# Altium PCB SUBBOARD-boost_filter_3p_LCL.PcbDoc
Units mm, origin at the board's own origin, x right, y up, seen from the top; angles counter-clockwise.
Board outline 144.4 x 140.72 mm, 2 copper layers (Top Layer, Bottom Layer), stack 1.569 mm thick; 76 components, 46 nets, 247 pads, 12 vias.
Unrouted connection lines stored in the file: 2.
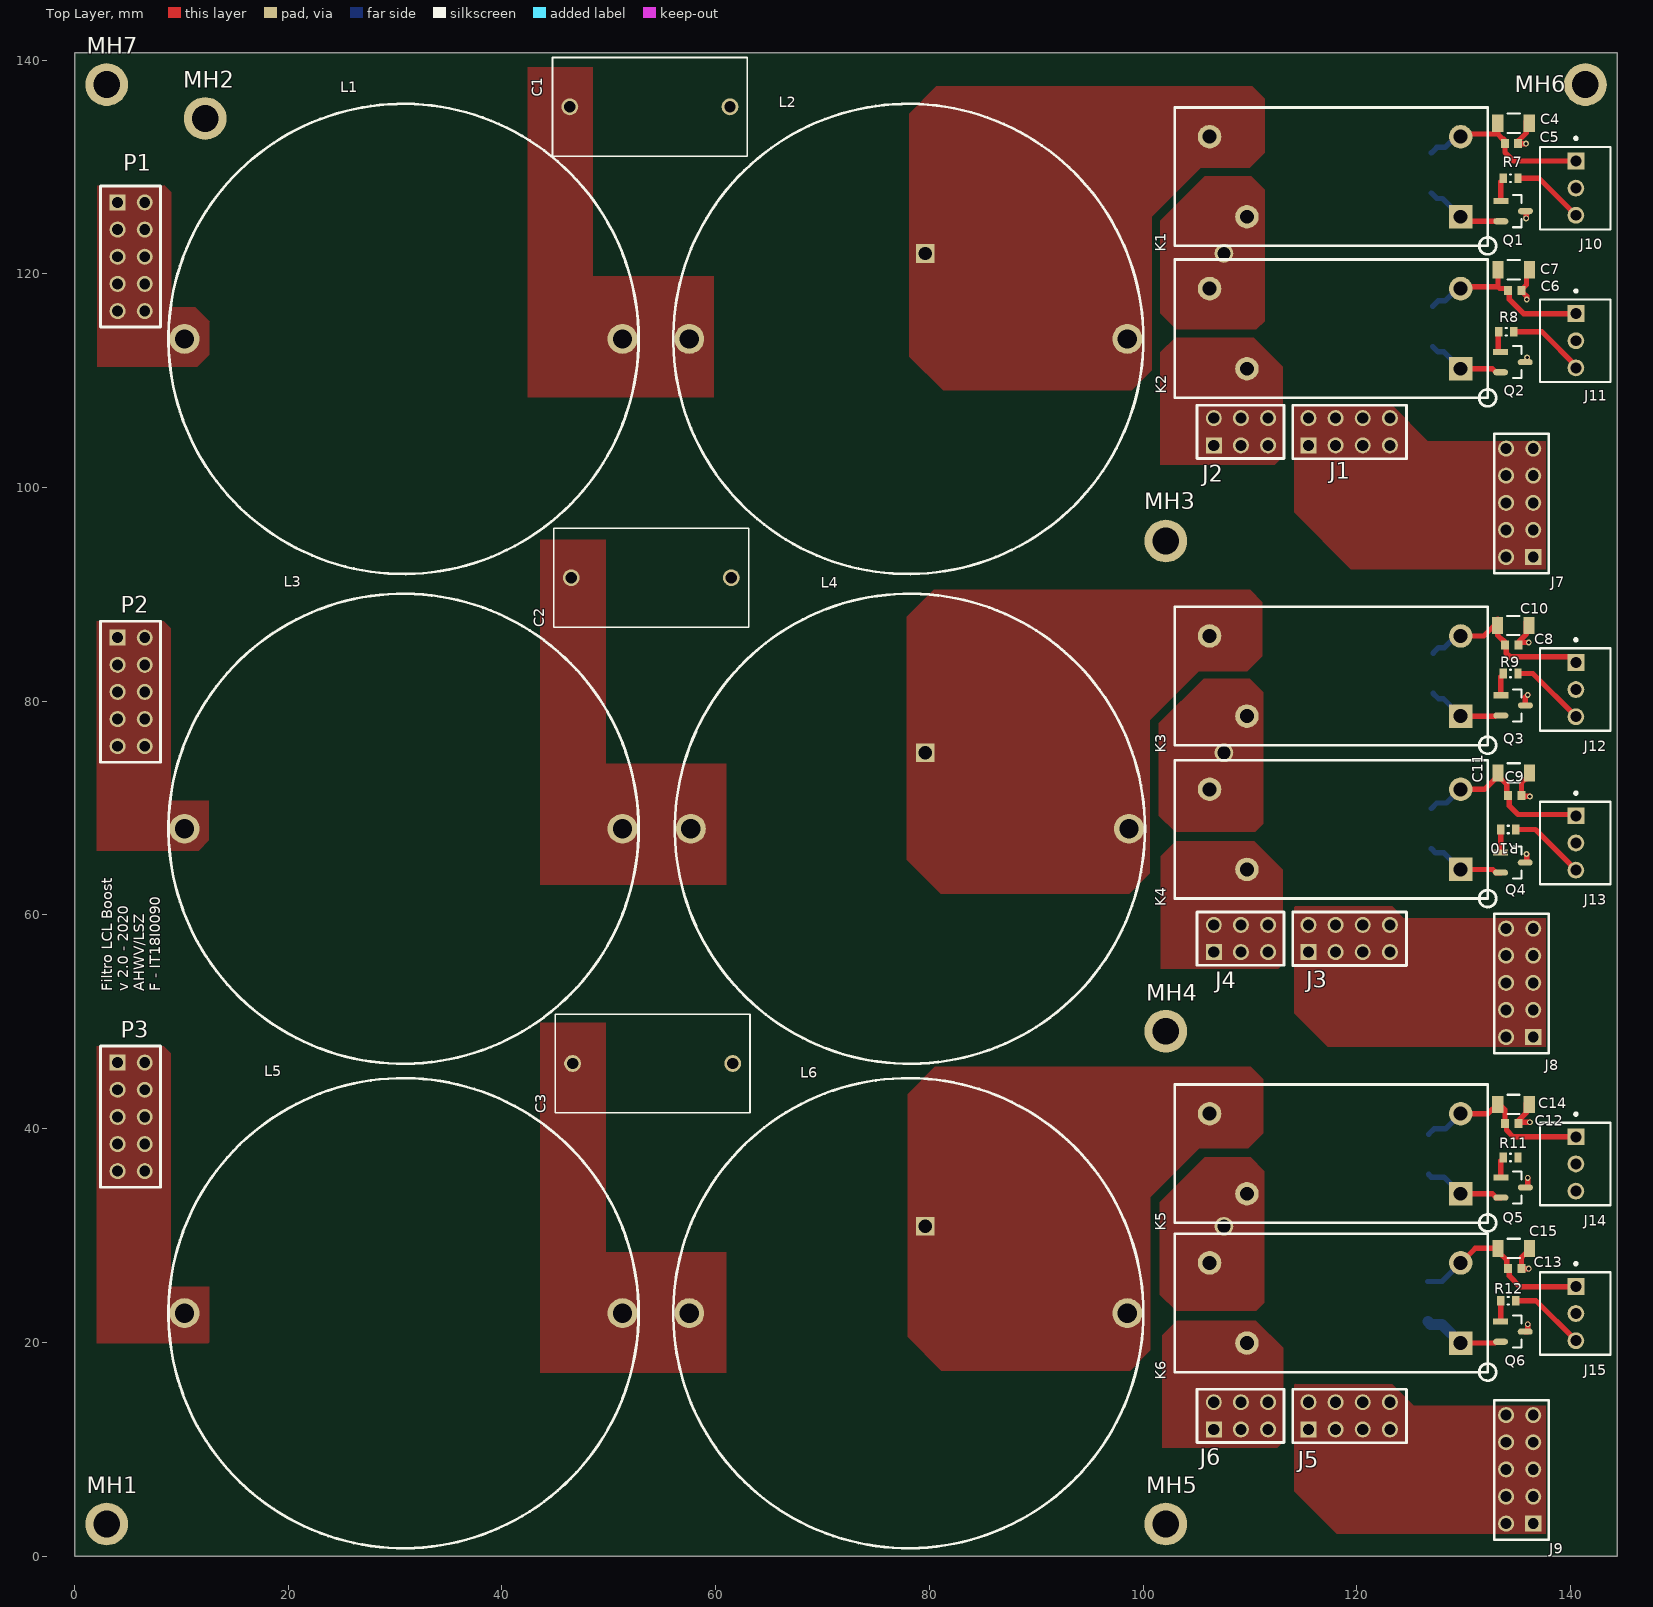
[diagram p0: Top Layer view]
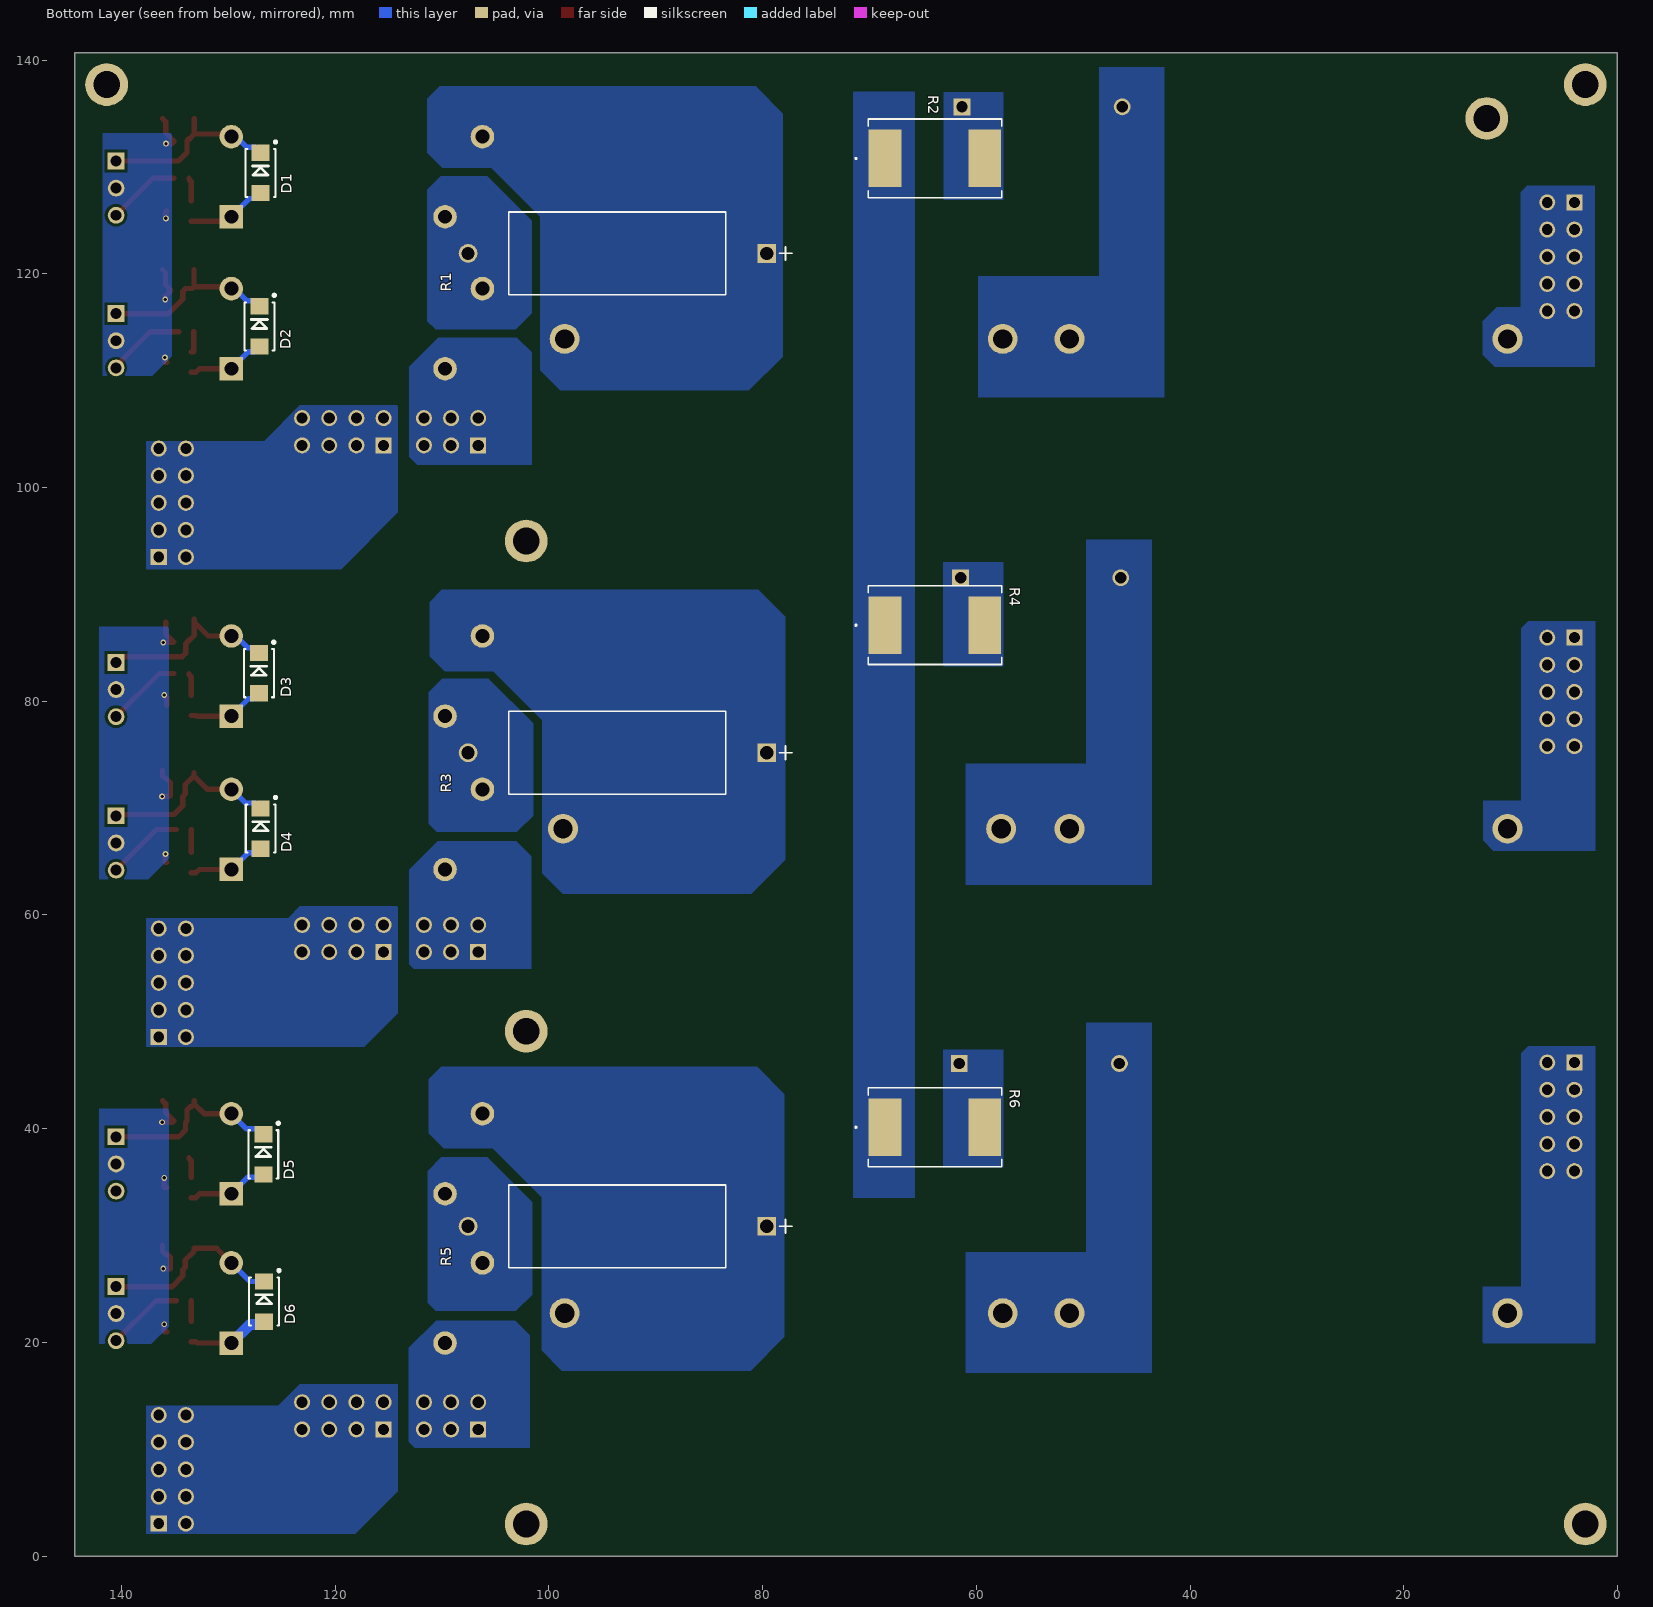
[diagram p1: Bottom Layer view, seen from below]
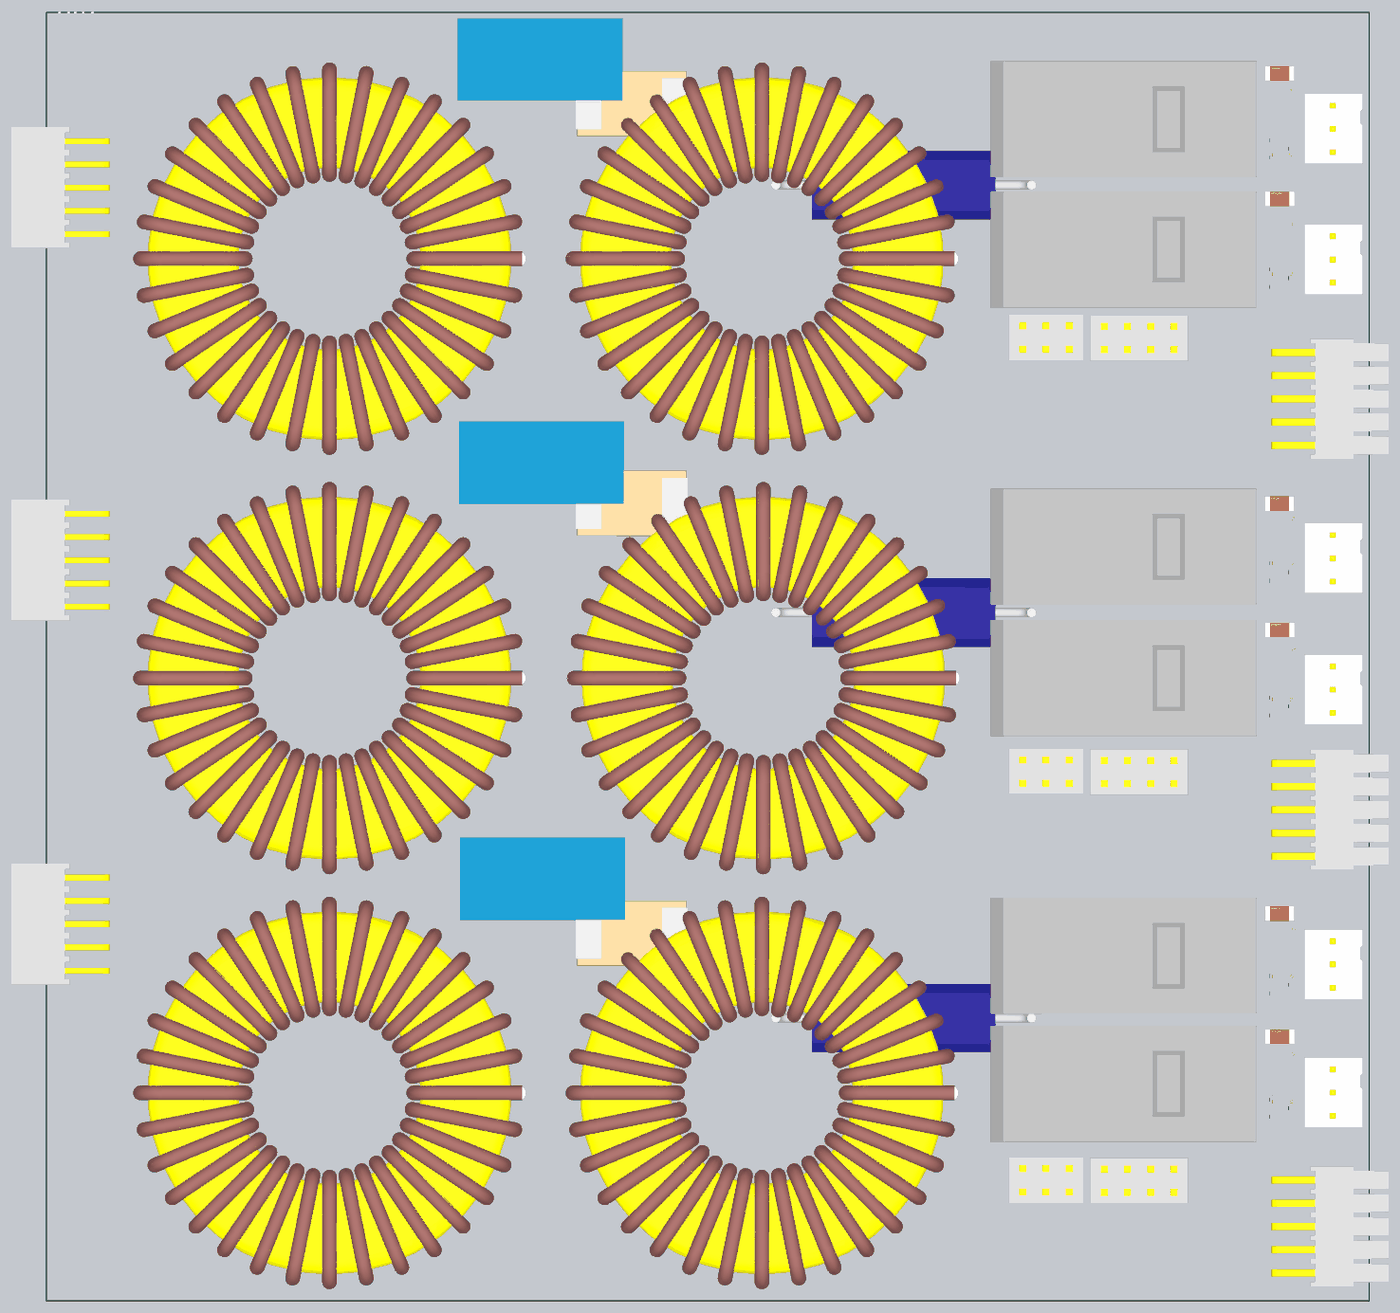
[diagram p2: 3D render of the assembled board from above, using the file's embedded part models]
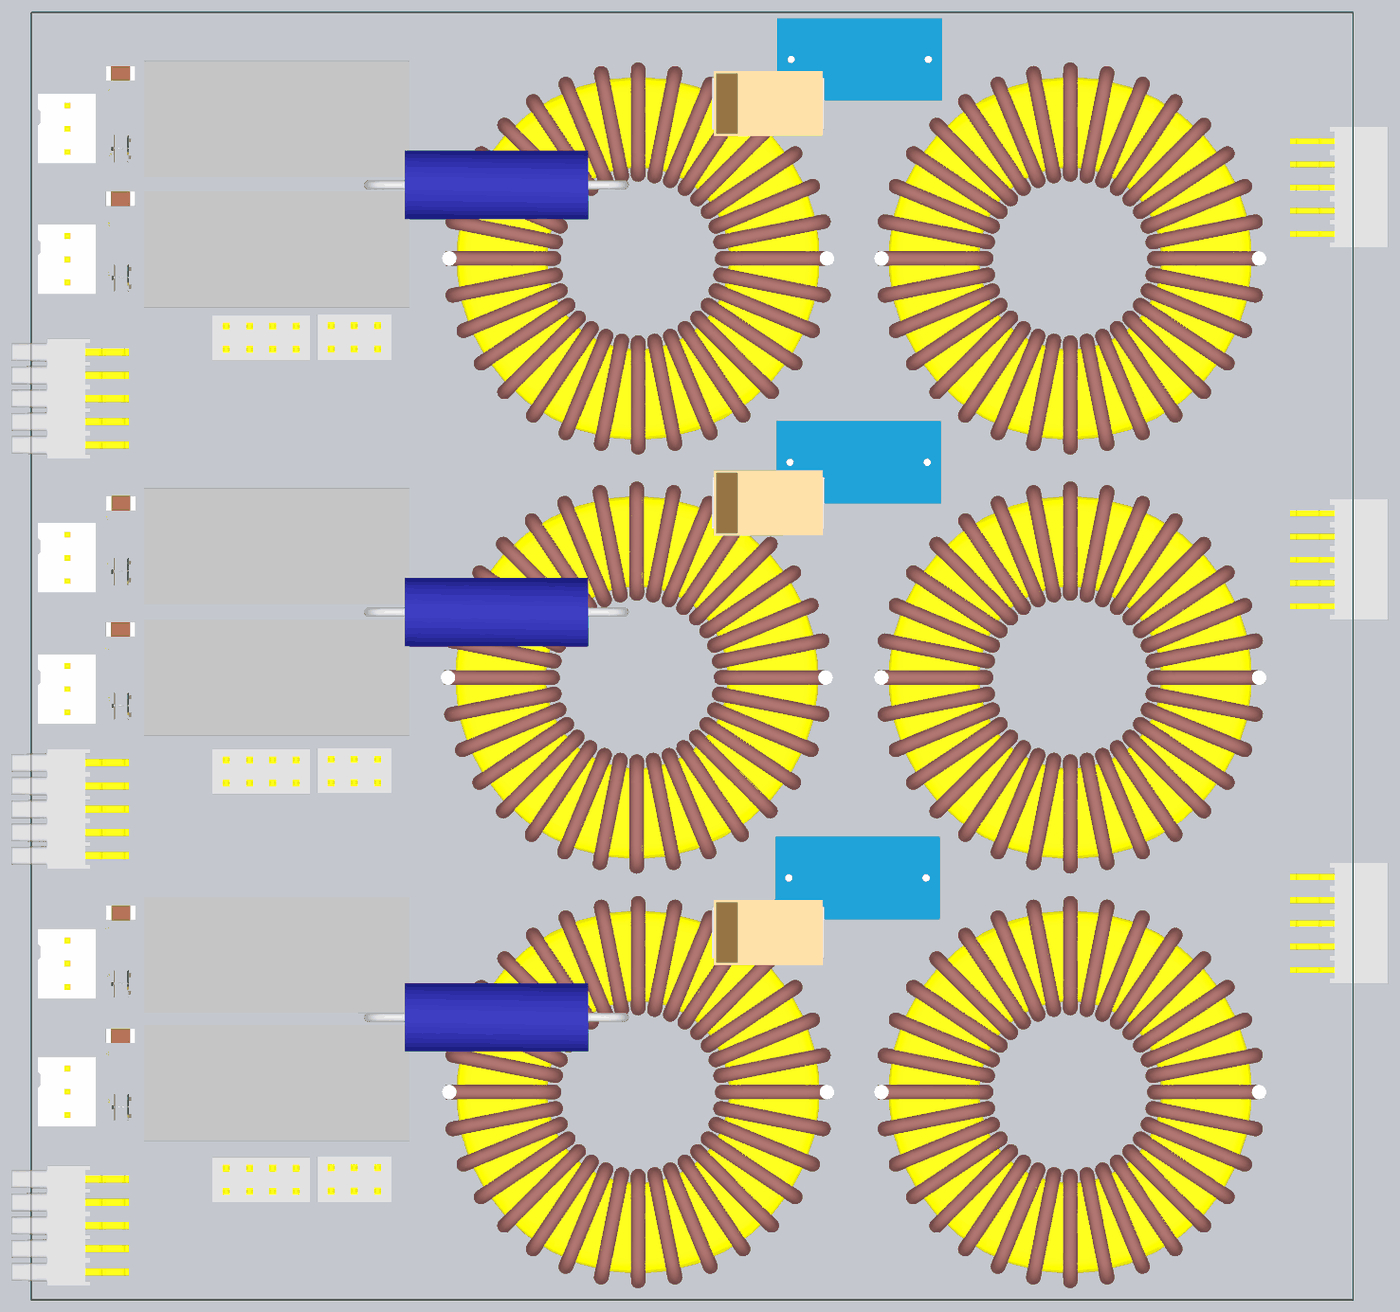
[diagram p3: 3D render of the assembled board from below, using the file's embedded part models]

## Layer stack, top to bottom
Top Solder: solder mask 0.0254, SM-001, Dk 4
Top Layer: signal copper 0.035
Dielectric 1: core 1.4986, Core-043, Dk 4.3
Bottom Layer: signal copper 0.035
Bottom Solder: solder mask 0.0254, SM-001, Dk 4

## Board outline
0,0 144.399,0 144.399,140.716 0,140.716

## Design rules (kind name [scope] priority, off if disabled: settings)
Clearance [All] p1: gap=0.254 ignorepadtopadclearanceinfootprint=FALSE except(0: Arc-Hole Track-Hole SMDPad-Hole THPad-Hole Via-Hole Fill-Hole Poly-Hole Region-Hole Text-Hole)
PolygonConnect [All] p1: connectstyle=Direct reliefconductorwidth=0.254 reliefentries=4 polygonreliefangle="90 Angle" airgapwidth=0.254
RoomDefinition SUBBOARD-boost_filter_3p_LCL [InComponentClass('SUBBOARD-boost_filter_3p_LCL')] p1: confinementstyle=ConfineIn formatcopy=TRUE lockcomponents=FALSE outline -10.922,-1.524 146.685,-1.524 146.685,141.732 -10.922,141.732
RoutingVias [All] p1: holewidth=0.711 width=1.27 viastyle="Through Hole" minholewidth=0.711 minwidth=1.27 maxholewidth=0.711 maxwidth=1.27
SolderMaskExpansion [All] p1: expansion=0.102 istentingtop=FALSE
Width Width_HPower [InNetClass('PhC[1..3]') or InNetClass('PhF[1..3]') or InNetClass('PhK[1..3]') or InNetClass('PhI[1..3]') or InNetClass('PhD[1..3]') or InNetClass('PhDR[1..3]')] p1: maxlimit=10 minlimit=0.254 preferedwidth=5
Width [All] p2: maxlimit=1.016 minlimit=0.254 preferedwidth=0.508 minimp=50.000000 maximp=50.000000 favimp=50.000000
30 further rules are at their usual default settings.

## Classes and differential pairs
net class PhIF[1..3]: PhIF1 PhIF2 PhIF3
net class PhDR[1..3]: PhDR1 PhDR2 PhDR3
net class PhK[1..3]: PhK1 PhK2 PhK3
net class PhD[1..3]: PhD1 PhD2 PhD3
net class PhI[1..3]: PhI1 PhI2 PhI3
net class PhF[1..3]: PhF1 PhF2 PhF3
net class PhC[1..3]: PhC1 PhC2 PhC3

## Components (designator, comment, footprint, x,y, rotation, side; value= is the part's Value field where it differs from the comment)
C1 "B32652A6224K" B32652XXXXX 46.355,135.636 r180 top value=Value
C2 "B32652A6224K" B32652XXXXX 46.482,91.567 r180 top value=Value
C3 "B32652A6224K" B32652XXXXX 46.609,46.101 r180 top value=Value
C4 "GRT31CR61H106KE01L" FP-GRT31-0_2-MFG 134.68,134.1 r180 top value=10uF
C5 "CL10B104KB8NNNC" SAMS-C0603-2_L 134.49,132.19 r0 top
C6 "CL10B104KB8NNNC" SAMS-C0603-2_L 134.789,118.453 r0 top
C7 "GRT31CR61H106KE01L" FP-GRT31-0_2-MFG 134.694,120.392 r180 top value=10uF
C8 "CL10B104KB8NNNC" SAMS-C0603-2_L 134.5,85.27 r0 top
C9 "CL10B104KB8NNNC" SAMS-C0603-2_L 134.789,71.2 r0 top
C10 "GRT31CR61H106KE01L" FP-GRT31-0_2-MFG 134.65,87.09 r180 top value=10uF
C11 "GRT31CR61H106KE01L" FP-GRT31-0_2-MFG 134.694,73.3 r180 top value=10uF
C12 "CL10B104KB8NNNC" SAMS-C0603-2_L 134.51,40.47 r0 top
C13 "CL10B104KB8NNNC" SAMS-C0603-2_L 134.789,26.9 r0 top
C14 "GRT31CR61H106KE01L" FP-GRT31-0_2-MFG 134.67,42.28 r180 top value=10uF
C15 "GRT31CR61H106KE01L" FP-GRT31-0_2-MFG 134.694,28.8 r180 top value=10uF
D1 "BYG23T-M3/TR" BYG23T-M3/TR 126.99,129.45 r270 bottom
D2 "BYG23T-M3/TR" BYG23T-M3/TR 127.1,115.09 r270 bottom
D3 "BYG23T-M3/TR" BYG23T-M3/TR 127.15,82.63 r270 bottom
D4 "BYG23T-M3/TR" BYG23T-M3/TR 126.98,68.09 r270 bottom
D5 "BYG23T-M3/TR" BYG23T-M3/TR 126.73,37.6 r270 bottom
D6 "BYG23T-M3/TR" BYG23T-M3/TR 126.66,23.82 r270 bottom
J1 "SSW-104-01-G-D" SSW-104-01-G-D 115.482,103.959 r90 top
J2 "SSW-103-01-G-D" SSW-103-01-G-D 106.622,103.959 r90 top
J3 "SSW-104-01-G-D" SSW-104-01-G-D 115.482,56.53 r90 top
J4 "SSW-103-01-G-D" SSW-103-01-G-D 106.622,56.53 r90 top
J5 "SSW-104-01-G-D" SSW-104-01-G-D 115.482,11.86 r90 top
J6 "SSW-103-01-G-D" SSW-103-01-G-D 106.622,11.86 r90 top
J7 "IPS1-105-01-L-D-RA" IPS1-105-01-L-D-RA 136.521,93.496 r180 top
J8 "IPS1-105-01-L-D-RA" IPS1-105-01-L-D-RA 136.521,48.573 r180 top
J9 "IPS1-105-01-L-D-RA" IPS1-105-01-L-D-RA 136.521,3.033 r180 top
J10 "22-11-2032" FP-22-11-2032-MFG 140.438,128.03 r270 top
J11 "22-11-2032" FP-22-11-2032-MFG 140.438,113.745 r270 top
J12 "22-11-2032" FP-22-11-2032-MFG 140.438,81.1 r270 top
J13 "22-11-2032" FP-22-11-2032-MFG 140.438,66.74 r270 top
J14 "22-11-2032" FP-22-11-2032-MFG 140.438,36.7 r270 top
J15 "22-11-2032" FP-22-11-2032-MFG 140.438,22.7 r270 top
K1 "G2RL-1A-E-HADC5" "G2RL-1A-E-HA DC5" 129.728,125.349 r180 top
K2 "G2RL-1A-E-HADC5" "G2RL-1A-E-HA DC5" 129.728,111.125 r180 top
K3 "G2RL-1A-E-HADC5" "G2RL-1A-E-HA DC5" 129.728,78.613 r180 top
K4 "G2RL-1A-E-HADC5" "G2RL-1A-E-HA DC5" 129.728,64.262 r180 top
K5 "G2RL-1A-E-HADC5" "G2RL-1A-E-HA DC5" 129.728,33.909 r180 top
K6 "G2RL-1A-E-HADC5" "G2RL-1A-E-HA DC5" 129.728,19.939 r180 top
L1 "ATCA-08-251M-H" ATCA-08-251M-H 10.287,113.919 r0 top
L2 "ATCA-08-251M-H" ATCA-08-251M-H 57.531,113.919 r0 top
L3 "ATCA-08-251M-H" ATCA-08-251M-H 10.287,68.072 r0 top
L4 "ATCA-08-251M-H" ATCA-08-251M-H 57.679,68.072 r0 top
L5 "ATCA-08-251M-H" ATCA-08-251M-H 10.287,22.733 r0 top
L6 "ATCA-08-251M-H" ATCA-08-251M-H 57.531,22.733 r0 top
MH1 "_MH_2p5_4-round" _MH_2p5_4-round#1 3,3 r0 top
MH2 "_MH_2p5_4-round" _MH_2p5_4-round#2 12,134.57 r0 top
MH3 "_MH_2p5_4-round" _MH_2p5_4-round#3 99.855,95 r0 top
MH4 "_MH_2p5_4-round" _MH_2p5_4-round#4 102.135,50 r270 top
MH5 "_MH_2p5_4-round" _MH_2p5_4-round#1 102.135,3 r0 top
MH6 "_MH_2p5_4-round" _MH_2p5_4-round#1 141.4,137.72 r0 top
MH7 "_MH_2p5_4-round" _MH_2p5_4-round#1 3,137.72 r0 top
P1 "IPT1-105-01-S-D-RA" IPT1-105-01-S-D-RA 4.027,126.687 r0 top
P2 "IPT1-105-01-S-D-RA" IPT1-105-01-S-D-RA 4.027,85.955 r0 top
P3 "IPT1-105-01-S-D-RA" IPT1-105-01-S-D-RA 4.027,46.182 r0 top
Q1 "DMN1019USN-7" FP-SC59-IPC_B 134.637,125.872 r0 top
Q2 "DMN1019USN-7" FP-SC59-IPC_B 134.616,111.745 r0 top
Q3 "DMN1019USN-7" FP-SC59-IPC_B 134.637,79.62 r0 top
Q4 "DMN1019USN-7" FP-SC59-IPC_B 134.616,64.912 r0 top
Q5 "DMN1019USN-7" FP-SC59-IPC_B 134.637,34.498 r0 top
Q6 "DMN1019USN-7" FP-SC59-IPC_B 134.616,21.009 r0 top
R1 "WHE10RFET" RES_WH/NE 107.569,121.92 r0 bottom value=Value
R2 "WSR5R1000FEA" WSR-L 63.881,130.81 r180 bottom value=0.1ohm
R3 "WHE10RFET" RES_WH/NE 107.569,75.184 r0 bottom value=Value
R4 "WSR5R1000FEA" WSR-L 63.881,87.122 r180 bottom value=0.1ohm
R5 "WHE10RFET" RES_WH/NE 107.569,30.861 r0 bottom value=Value
R6 "WSR5R1000FEA" WSR-L 63.881,40.132 r180 bottom value=0.1ohm
R7 "Jumper 0603(1608)" RESC0603(1608)_L 134.393,128.953 r180 top value="0.00 Ohm"
R8 "Jumper 0603(1608)" RESC0603(1608)_L 133.989,114.594 r180 top value="0.00 Ohm"
R9 "Jumper 0603(1608)" RESC0603(1608)_L 134.393,82.6 r180 top value="0.00 Ohm"
R10 "Jumper 0603(1608)" RESC0603(1608)_L 134.189,68 r180 top value="0.00 Ohm"
R11 "Jumper 0603(1608)" RESC0603(1608)_L 134.393,37.3 r180 top value="0.00 Ohm"
R12 "Jumper 0603(1608)" RESC0603(1608)_L 134.189,23.9 r180 top value="0.00 Ohm"

## Footprints (in the part's own frame and the unit in brackets; to place one, negate y for a bottom-side part, rotate by r counter-clockwise, add the part's x,y. Pads: shape width x height; smd on the part's side, far side on the other; paste and mask are expansions set on the pad)
_MH_2p5_4-round#1 [mm] "Matching hole, 2.5mm hole, 4mm pad (round)"
  round 4 hole 2.5: *(0,0)
_MH_2p5_4-round#2 [mm] "Matching hole, 2.5mm hole, 4mm pad (round)"
  round 4 hole 2.5: *(0.22,-0.02)
_MH_2p5_4-round#3 [mm] "Matching hole, 2.5mm hole, 4mm pad (round)"
  round 4 hole 2.5: *(2.28,0)
_MH_2p5_4-round#4 [mm] "Matching hole, 2.5mm hole, 4mm pad (round)"
  round 4 hole 2.5: *(0.88,0)
ATCA-08-251M-H [mm] "Fixed Inductors 250uH 27 mOhm Horizontal"
  round 2.8 hole 1.8: 1(0,0) 2(41,0)
  silkscreen extent -1.5,-22 42.5,22, body extent -0.87,-21.5 42.03,21.4, height 21.75
B32652XXXXX [mil] "B32652 capacitors TDK EPCOS"
  round 62 / inner rect 62x62 / far side rect 62x62 hole 42 mask+0: 1(-590,0)
  round 62 hole 42 mask+0: 2(0,0)
  silkscreen extent -654,-182 64,182, body extent -651,-177 58,177, height 689
BYG23T-M3/TR [mm] "Fast / Ultrafast Diode, 1.3 kV, 1 A, Single, 1.9 V, 75 ns, 18 A"
  rect 1.52x1.68 smd: 1(-1.88,0) 2(1.88,0)
  silkscreen extent -3.02,-1.4 2.25,1.51, body extent -2.25,-1.39 2.25,1.4, height 2.29
FP-22-11-2032-MFG [mm]
  rect 1.57x1.57 hole 1.02 paste-1000 mask+0: 1(-2.54,0.075)
  round 1.57 hole 1.02 paste-1000 mask+0: 2(0,0.075) 3(2.54,0.075)
  silkscreen extent -4.78,-3.3 3.86,3.3, body extent -3.96,-3.4 3.96,3.4, height 0.25
FP-GRT31-0_2-MFG [mm]
  rect 1.05x1.6 smd paste+0 mask+0: 1(-1.475,0) 2(1.475,0)
  silkscreen extent -0.58,-0.9 0.58,0.9, body extent -2.1,-1 2.1,1, height 0.25
FP-SC59-IPC_B [mm]
  rect 1.407x0.576 smd paste+0 mask+0: 1(-1.151,0.95)
  rrect100% 1.407x0.576 smd paste+0 mask+0: 2(-1.151,-0.95) 3(1.151,0)
  silkscreen extent 0,-1.5 0.8,1.5, body extent -2.1,-1.75 2.1,1.75, height 0.25
"G2RL-1A-E-HA DC5" [mm] "General Purpose Relays PCB Power Relay Low Profile 16A"
  rect 2.2x2.2 hole 1.3: 1(0,0)
  round 2.2 hole 1.3: 3(23.5,-7.5) 4(20,0) 5(0,-7.5)
  silkscreen extent -3.32,-10.23 26.75,3.52, body extent -2.4,-10.1 26.6,2.6, height 15.7
IPS1-105-01-L-D-RA [mm]
  rect 1.5x1.5 hole 1.02: 1(0,0)
  round 1.5 hole 1.02: 2(2.54,0) 3(0,-2.54) 4(2.54,-2.54) 5(0,-5.08) 6(2.54,-5.08) 7(0,-7.62) 8(2.54,-7.62) 9(0,-10.16) 10(2.54,-10.16)
  silkscreen extent -1.45,-11.55 3.65,1.5, body extent -10.03,-11.59 2.74,1.49, height 4.97
IPT1-105-01-S-D-RA [mm]
  rect 1.5x1.5 hole 1.02: 1(0,0)
  round 1.5 hole 1.02: 2(2.54,0) 3(0,-2.54) 4(2.54,-2.54) 5(0,-5.08) 6(2.54,-5.08) 7(0,-7.62) 8(2.54,-7.62) 9(0,-10.16) 10(2.54,-10.16)
  silkscreen extent -1.6,-11.65 4.03,1.55, body extent -7.9,-11.65 2.83,1.55, height 5.09
RES_WH/NE [mil]
  rect 69x69 hole 49 mask+0: 1(-1100,0)
  round 69 hole 49 mask+0: 2(0,0)
  silkscreen extent -1194,-152 -150,153, body extent -1119,-147 19,147, height 295
RESC0603(1608)_L [mm] "Chip Resistor, Body 1.6x0.8mm, IPC High Density"
  rect 0.7x0.9 smd: 1(-0.7,0) 2(0.7,0)
  silkscreen extent -0.05,-0.35 0.05,0.35, body extent -0.85,-0.47 0.85,0.47, height 0.6
SAMS-C0603-2_L [mm] "Chip Capacitor, 2-Leads, Body 1.70x0.90mm, IPC High Density"
  rect 0.75x0.85 smd: 1(-0.625,0) 2(0.625,0)
  body extent -0.85,-0.45 0.85,0.45, height 0.9
SSW-103-01-G-D [mm]
  rect 1.5x1.5 hole 1.04: 1(0,0)
  round 1.5 hole 1.04: 2(2.54,0) 3(0,-2.54) 4(2.54,-2.54) 5(0,-5.08) 6(2.54,-5.08)
  silkscreen extent -1.22,-6.58 3.75,1.58, body extent -1.2,-6.57 3.76,1.56, height 8.52
SSW-104-01-G-D [mm]
  rect 1.5x1.5 hole 1.04: 1(0,0)
  round 1.5 hole 1.04: 2(2.54,0) 3(0,-2.54) 4(2.54,-2.54) 5(0,-5.08) 6(2.54,-5.08) 7(0,-7.62) 8(2.54,-7.62)
  silkscreen extent -1.25,-9.18 3.75,1.48, body extent -1.25,-9.17 3.7,1.5, height 8.52
WSR-L [mil]
  rect 121x212 smd paste+0 mask+0: 1(-183.5,0) 2(183.5,0)
  silkscreen extent -294,-145 246,145, body extent -241,-140 241,140, height 49

## Part data
C1 C2 C3: "Film Capacitors 0.22uF 630volts 5%", Capacitance="0.22 uF", Supplier Part Number 1=871-B32652A6224J189, Voltage Rating AC="250 VAC", Voltage Rating DC="630 VDC", Built_By=EMA_UL_Team, Copyright="Copyright (C) 2018 Accelerated Designs. All rights reserved", Manufacturer_Part_Number=B32652A6224K, RefDes=RefDes, Supplier 1=Mouser, Supplier 2=Arrow, Supplier Part Number 2=B32652A6224J189, Type=DEV, Vendor=Epcos
C4 C7 C10 C11 C14 C15: library part CMP-06035-000076-1, "CAP CER 10UF 50V X5R 1206", Capacitance=10uF, Manufacturer=Murata, Package=GRT31-0.2, Temperature="-55°C to +85°C", Temperature Characteristic=X5R, Temperature Coefficient=15%, Temperature Range High=+85°C, Temperature Range Low=-55°C, Tolerance=10%, Voltage Rating=50V, Automotive=Yes, Automotive Grade="Grade 3", Category=Cap, ComponentLink2Description=Datasheet, ComponentLink2URL=https://search.murata.co.jp/Ceramy/image/img/A01X/G101/ENG/GRT31CR61H106KE01-01.pdf, Device Class L1="Passive Components", Device Class L2=Capacitors, Device Class L3="Ceramic Capacitors", Digikey Description="CAP CER 10UF 50V X5R 1206", Height=1.8mm, Ipc Land Pattern Name=CAPC320160X160, Lead Free=Yes, Manufacturer Part Number=GRT31CR61H106KE01L, Material=Ceramic, Octopart=https://octopart.com/grt31cr61h106ke01l-murata-62921736, RoHS=TRUE
C5 C6 C8 C9 C12 C13: library part CMP-2000-05332-1, "Multi-layer Ceramic Capacitor, -55 to 125 degC, 2-Pin SMD (0603), RoHS, Tape and Reel", Capacitance=0.1µF, Case Size/Dimension=0603, Dielectric=X7R, Manufacturer="Samsung Electro-Mechanics", Rated Voltage=50V, Tolerance (%)=±10%, Datasheet URL=https://datasheet.ciiva.com/29198/456651-da-01-en-vs-kondensator-0605-29198839.pdf, Datasheet Version=Nov-10, Manufacturer URL=http://www.samsungsem.com/global/index.jsp
D1 D2 D3 D4 D5 D6: "DIODE AVALANCHE 1300V 1A DO214AC", Average Rectified Current=1A, Case/Package=SMA, Forward Voltage=1.9V, Manufacturer="Vishay Semiconductors", Max Forward Surge Current (Ifsm)=18A, Max Operating Temperature=150°C, Max Power Dissipation=800mW, Max Repetitive Reverse Voltage (Vrrm)=1.3kV, Min Operating Temperature=-55°C, Package Quantity=1, Peak Reverse Current=5uA, Supplier Part Number 1=70AC6454, Zener Voltage=200V, Category="Rectifier Diodes", ComponentLink1Description=https://datasheet.ciiva.com/23642/byg23t-23642320.pdf?src-supplier=Newark, ComponentLink1URL=https://datasheet.ciiva.com/23642/byg23t-23642320.pdf?src-supplier=Newark, ComponentLink2Description=https://datasheet.ciiva.com/30479/0900766b810d43bd-30479333.pdf?src-supplier=RSComponents, ComponentLink2URL=https://datasheet.ciiva.com/30479/0900766b810d43bd-30479333.pdf?src-supplier=RSComponents, ComponentLink3Description=https://datasheet.ciiva.com/4454/byg23t-85630-4454047.pdf?src-supplier=Mouser, ComponentLink3URL=https://datasheet.ciiva.com/4454/byg23t-85630-4454047.pdf?src-supplier=Mouser, ComponentLink4Description=https://datasheet.ciiva.com/920/byg23t-920130.pdf?src-supplier=Digi-Key, ComponentLink4URL=https://datasheet.ciiva.com/920/byg23t-920130.pdf?src-supplier=Digi-Key, ComponentLink5Description=https://datasheet.ciiva.com/920/byg23t-920131.pdf?src-supplier=Digi-Key, ComponentLink5URL=https://datasheet.ciiva.com/920/byg23t-920131.pdf?src-supplier=Digi-Key, ComponentLink6Description=https://datasheet.ciiva.com/920/byg23t-920132.pdf?src-supplier=Digi-Key, ComponentLink6URL=https://datasheet.ciiva.com/920/byg23t-920132.pdf?src-supplier=Digi-Key, ComponentLink7Description=https://datasheet.ciiva.com/1178/byg23t-1178213.pdf?src-supplier=Element14, ComponentLink7URL=https://datasheet.ciiva.com/1178/byg23t-1178213.pdf?src-supplier=Element14, Contact Plating=Tin,Matte, Diode Type=Avalanche, Element Configuration=Single, Forward Current=1A, Height=2.29mm, Length=4.5mm, Manufacturer Part Number=BYG23T-M3/TR, Max Reverse Voltage (DC)=1.3kV, Max Surge Current=18A, Mount="Surface Mount", Number of Pins=2, Packaging="Tape and Reel", Peak Non-Repetitive Surge Current=18A, Pricing 1="1=0.16100, 10=0.16100, 25=0.16100, 50=0.16100, 100=0.16100, 250=0.16100, 500=0.16100, 1000=0.14800 (USD)", Radiation Hardening=No, REACH SVHC=Unknown, Recovery Time=75ns, Reverse Recovery Time=75ns, Reverse Voltage=1.3kV, RoHS=Yes, Stock 1=6980, Supplier 1=Newark, Width=2.79mm
J1 J3 J5: "Conn Socket Strip SKT 8 POS 2.54mm Solder ST Thru-Hole", Color=Black, Contact Resistance=10mR, Current Rating=6.9A, Manufacturer=Samtec, Max Operating Temperature=125°C, Max Voltage Rating (AC)=550V, Min Operating Temperature=-55°C, Supplier Part Number 1=SAM1208-04-ND, Category="Headers and Wire Housings", ComponentLink1Description=https://datasheet.ciiva.com/25617/0900766b8115c03d-25617355.pdf?src-supplier=RSComponents, ComponentLink1URL=https://datasheet.ciiva.com/25617/0900766b8115c03d-25617355.pdf?src-supplier=RSComponents, ComponentLink2Description=https://datasheet.ciiva.com/22677/82032-22677624.pdf?src-supplier=Element14, ComponentLink2URL=https://datasheet.ciiva.com/22677/82032-22677624.pdf?src-supplier=Element14, ComponentLink3Description=https://datasheet.ciiva.com/749/ssw-1xx-xx-xxx-x-xx-xxx-xx-mkt-749827.pdf?src-supplier=Digi-Key, ComponentLink3URL=https://datasheet.ciiva.com/749/ssw-1xx-xx-xxx-x-xx-xxx-xx-mkt-749827.pdf?src-supplier=Digi-Key, Connector Type=Receptacle,Socket, Contact Material=Bronze, Contact Plating=Gold, Depth=4.95mm, Gender=Receptacle, Housing Color=Black, Housing Material=Polymer, Lead Free="Lead Free", Length=10.67mm, Manufacturer Part Number=SSW-104-01-G-D, Mating Cycles=100, Max Current Rating=6.9A, Mount="Through Hole", Number of Contacts=8, Number of Positions=8, Number of Rows=2, Orientation=Vertical, Packaging=Bulk, Pitch=2.54mm, Pricing 1="1=1.24000, 10=1.09400, 25=1.03000, 50=0.98700, 100=0.94410, 250=0.85824, 500=0.77242 (USD)", Radiation Hardening=No, REACH SVHC="No SVHC", RoHS=Yes, Row Spacing=0.1inch, Stock 1=1152, Supplier 1=Digi-Key, Termination=Solder, Voltage Rating=550V
J2 J4 J6: "Conn Socket Strip SKT 6 POS 2.54mm Solder ST Thru-Hole", Color=Black, Contact Resistance=10mR, Current Rating=6.9A, Manufacturer=Samtec, Max Operating Temperature=125°C, Max Voltage Rating (AC)=550V, Min Operating Temperature=-55°C, Supplier Part Number 1=SAM1208-03-ND, Category="Headers and Wire Housings", ComponentLink1Description=https://datasheet.ciiva.com/25617/0900766b8115c03d-25617399.pdf?src-supplier=RSComponents, ComponentLink1URL=https://datasheet.ciiva.com/25617/0900766b8115c03d-25617399.pdf?src-supplier=RSComponents, ComponentLink2Description=https://datasheet.ciiva.com/22677/82032-22677622.pdf?src-supplier=Element14, ComponentLink2URL=https://datasheet.ciiva.com/22677/82032-22677622.pdf?src-supplier=Element14, ComponentLink3Description=https://datasheet.ciiva.com/749/ssw-1xx-xx-xxx-x-xx-xxx-xx-mkt-749828.pdf?src-supplier=Digi-Key, ComponentLink3URL=https://datasheet.ciiva.com/749/ssw-1xx-xx-xxx-x-xx-xxx-xx-mkt-749828.pdf?src-supplier=Digi-Key, Connector Type=Receptacle,Socket, Contact Material=Bronze, Contact Plating=Gold, Depth=4.95mm, Gender=Receptacle, Housing Color=Black, Housing Material=Polymer, Lead Free="Lead Free", Length=8.13mm, Manufacturer Part Number=SSW-103-01-G-D, Mating Cycles=100, Max Current Rating=6.9A, Mount="Through Hole", Number of Contacts=6, Number of Positions=6, Number of Rows=2, Orientation=Vertical, Packaging=Bulk, Pitch=2.54mm, Pricing 1="1=0.93000, 10=0.82100, 25=0.77240, 50=0.74020, 100=0.70800, 250=0.64368, 500=0.57932 (USD)", Pricing 2="1=0.94640, 1=0.93000, 4167=0.71590, 8334=0.59720, 41667=0.52200, 83334=0.49330 (USD)", Pricing 3="1=1.35000, 10=1.10000, 100=0.98200, 250=0.91700, 500=0.79200, 1000=0.69000 (USD)", Radiation Hardening=No, REACH SVHC="No SVHC", RoHS=Yes, Row Spacing=0.1inch, Stock 1=1397, Stock 2=1, Stock 3=388, Supplier 1=Digi-Key, Supplier 2=Arrow, Supplier 3=Mouser, Supplier Part Number 2=SSW-103-01-G-D, Supplier Part Number 3=200-SSW10301GD, Termination=Solder, Voltage Rating=550V
J7 J8 J9: "SAMTEC         IPS1-105-01-L-D-RA             Board-To-Board Connector, Right Angle, IPS1 Series, 10 Contacts, Receptacle, 2.54 mm, Through Hole", Current Rating=9A, Manufacturer=Samtec, Max Operating Temperature=125°C, Max Voltage Rating (AC)=550V, Min Operating Temperature=-55°C, Supplier Part Number 1=SAM9620-ND, Voltage Rating=777V, Category=Connectors, ComponentLink1Description=https://datasheet.ciiva.com/25618/0900766b8114c2ed-25618027.pdf?src-supplier=RSComponents, ComponentLink1URL=https://datasheet.ciiva.com/25618/0900766b8114c2ed-25618027.pdf?src-supplier=RSComponents, ComponentLink2Description=https://datasheet.ciiva.com/9444/ipt1-9444586.pdf?src-supplier=Avnet, ComponentLink2URL=https://datasheet.ciiva.com/9444/ipt1-9444586.pdf?src-supplier=Avnet, Contact Material=Bronze, Contact Plating=Gold, Depth=8.51mm, Gender=Receptacle, Housing Material=Polymer, Length=13.08mm, Manufacturer Part Number=IPS1-105-01-L-D-RA, Mount="Through Hole,Surface Mount", Number of Contacts=10, Number of Ports=1, Number of Rows=2, Number of Terminals=10, Orientation="Right Angle", Packaging=Bulk, Pitch=2.54mm, Pricing 1="1=2.75000, 10=2.64000, 100=2.20000, 500=1.87000, 1000=1.59500, 5000=1.43000 (USD)", Radiation Hardening=No, REACH SVHC="No SVHC", RoHS=Yes, Stock 1=364, Supplier 1=Digi-Key, Termination=Solder
J10 J11 J12 J13 J14 J15: library part CMP-04776-000113-1, "CONN HEADER VERT 3POS 2.54MM", Current Rating=4A, Manufacturer=Molex, Temperature="-40°C to +80°C", Temperature Range High=+80°C, Temperature Range Low=-40°C, Voltage Rating=500V, Automotive=No, Category=Conn, ComponentLink2Description=Datasheet, ComponentLink2URL=https://www.molex.com/webdocs/datasheets/pdf/en-us/0022112032_PCB_HEADERS.pdf, Conn Gender=Male, Conn Orientation=Vertical, Contact Material=Gold,Nickel, Device Class L1=Connectors, Device Class L2="Headers and Wire Housings", Device Class L3=unset, Digikey Description="CONN HEADER VERT 3POS 2.54MM", Footprint Url=https://www.molex.com/pdm_docs/sd/022112032_sd.pdf, Height=10.91mm, Lead Free=Yes, Manufacturer Part Number=22-11-2032, Mounting Type="Through Hole", Mouser Description="KK® 254 Solid Header, Vertical, with Friction Lock, 3 Circuits, Gold (Au) Plating", Number of Contacts=3, Number of Rows=1, Octopart=https://octopart.com/22-11-2032-molex-10085, Package=22-11-2032, Pitch=2.54mm, RoHS=TRUE
K1 K2 K3 K4 K5 K6: "General Purpose Relays PCB Power Relay Low Profile 16A SPST-NO 5V coil voltage", Coil Current="80 mA", Coil Voltage="5 VDC", Contact Current="16 A", Manufacturer=Omron, Power Consumption="400 mW", Supplier Part Number 1=72018308, Switching Voltage="440VAC; 300VDC", Manufacturer Part Number=G2RL-1A-E-HADC5, Pricing 1="100=2,510000 (USD)", Relay Contact Form="1 form A (SPST-NO)", RoHS=No, Supplier 1="Allied Electronics"
L1 L2 L3 L4 L5 L6: "Fixed Inductors 250uH 27 mOhm Max -40 C - 105 C - ABRACON", Inductance="250 uH", Maximum DC current="10 A", Maximum DC Resistance="27 mOhm", Supplier Part Number 1=535-13511-ND, Diameter="42.5 mm", Lead Diameter="1.6 mm", Supplier 1=Digi-Key, Supplier 2=Mouser, Supplier 3=Arrow, Supplier Part Number 2=815-ATCA-08-251M-H, Supplier Part Number 3=ATCA-08-251M-H
MH1 MH2 MH3 MH4 MH5 MH6 MH7: "matching hole 2.5 hole, 4mm pad (round)"
P1 P2 P3: "CONN PLUG .100\" 10POS DL PCB R/A", Color=Black, Manufacturer=Samtec, Max Current Rating=8A, Max Operating Temperature=125°C, Max Voltage Rating (AC)=550V, Min Operating Temperature=-55°C, Supplier Part Number 1=SAM8101-ND, Category=Connectors, ComponentLink1Description=https://datasheet.ciiva.com/716/ipt1-1xx-xx-xx-d-ra-xxx-mkt-716221.pdf?src-supplier=Digi-Key, ComponentLink1URL=https://datasheet.ciiva.com/716/ipt1-1xx-xx-xx-d-ra-xxx-mkt-716221.pdf?src-supplier=Digi-Key, ComponentLink2Description=https://datasheet.ciiva.com/7997/81376-7997581.pdf?src-supplier=Element14, ComponentLink2URL=https://datasheet.ciiva.com/7997/81376-7997581.pdf?src-supplier=Element14, ComponentLink3Description=https://datasheet.ciiva.com/9444/ipt1-9444638.pdf?src-supplier=Avnet, ComponentLink3URL=https://datasheet.ciiva.com/9444/ipt1-9444638.pdf?src-supplier=Avnet, Connector Type="Male Pin", Contact Material=Bronze, Contact Mating Length=0.155inch, Contact Plating=Gold, Depth=10.39mm, Gender=Male, Housing Color=Black, Housing Material=Polymer, Lead Free="Lead Free", Length=13.21mm, Manufacturer Part Number=IPT1-105-01-S-D-RA, Mount="Through Hole", Number of Contacts=10, Number of Ports=1, Number of Positions=10, Number of Rows=2, Number of Terminals=10, Orientation="Right Angle", Packaging=Rail/Tube, Pitch=2.54mm, Pricing 1="1=3.53000, 10=3.38400, 100=2.82000, 500=2.39700, 1000=2.04450, 5000=1.83300 (USD)", Radiation Hardening=No, REACH SVHC="No SVHC", RoHS=Yes, Row Spacing=0.1inch, Stock 1=449, Supplier 1=Digi-Key, Termination=Solder
Q1 Q2 Q3 Q4 Q5 Q6: library part CMP-12801-000099-1, "MOSFET N-CH 12V 9.3A SC59", Capacitance=2.426E-09F, Case/Package=TO-236-3, Continuous Drain Current (ID)=9.3A, Drain to Source Breakdown Voltage=12V, Drain to Source Resistance=41mR, Gate to Source Voltage (Vgs)=4.5V, Input Capacitance=2.426nF, Max Operating Temperature=150°C, Max Power Dissipation=680mW, Min Operating Temperature=-55°C, Package Quantity=3000, Drain to Source Voltage (Vdss)=12V, Element Configuration=Single, Fall Time=16.8ns, Lead Free="Lead Free", Mount="Surface Mount", Number of Channels=1, Packaging="Tape and Reel", Rds On Max=10mR, Rise Time=57.6ns, Turn-Off Delay Time=22.2ns, Turn-On Delay Time=7.6ns, Weight=0.000282oz
R1 R3 R5: "Wirewound Resistors - Through Hole 5W 10 ohm 1%", Power rating="5 W", Resistance="10 Ohm", Supplier Part Number 1=WHE10RFETCT-ND, Tolerance=1%, Built_By=EMA_UL_Team, Copyright="Copyright (C) 2018 Accelerated Designs. All rights reserved", Manufacturer_Part_Number=WHE10RFET, RefDes=RefDes, Supplier 1=Digi-Key, Supplier 2=Mouser, Supplier 3=Farnell, Supplier 4=Newark, Supplier Part Number 2=588-WHE10RFET, Supplier Part Number 3=2099554, Supplier Part Number 4=13T1795, Type=DEV, Vendor=Ohmite
R2 R4 R6: "RES 0.1 OHM 1% 5W 4527", Resistance="0.1 ohm", Built_By=EMA_UL_Team, Copyright="Copyright (C) 2018 Accelerated Designs. All rights reserved", Manufacturer_Part_Number=WSR5R1000FEA, RefDes=RefDes, Type=DEV, Vendor=Vishay
R7 R8 R9 R10 R11 R12: library part CMP-1012-00001-1, "Jumper 0603 (1608 Metric)", Case-EIA=0603, Case-Metric=1608, Power=None, Technology=SMT, Tolerance=None

## Via types
v1: diameter 0.55, hole 0.3, Top Layer to Bottom Layer, 12 vias

## Nets (pads, with @x,y where several pads share a name; then routed paths per layer and width w, separated by ;. In a path a pad name is that pad's centre, name@x,y a point inside that pad or via, vN(x,y) a via of type N, cw(c..) or ccw(c..) an arc to the next point about the centre after c; other vN are vias at no path point)
GND: C4.1 C5.2 C6.2 C7.1 C8.2 C9.2 C10.1 C11.1 C12.2 C13.2 C14.1 C15.1 J10.2 J11.2 J12.2 J13.2 J14.2 J15.2 Q1.3 Q2.3 Q3.3 Q4.3 Q5.3 Q6.3 | length 25.5
  Top Layer w0.5: Q6.3 135.965,21.009 136,21.044 v1(136,21.7) ; Q4.3 135.865,64.912 135.9,64.947 v1(135.9,65.7) ; Q2.3 135.938,111.745 135.95,111.733 v1(135.95,112.18) ; Q5.3 135.965,34.498 136,34.533 v1(136,35.4) ; Q3.3 135.788,80.388 v1(136,80.6) ; Q1.3 135.821,125.872 135.856,125.837 v1(135.856,125.203) ; v1(135.845,132.191) 135.35,132.191 135.302,132.239 135.252,132.239 135.127,132.364 135.127,132.414 135.127,132.464 135.876,133.213 135.876,134.25 C4.1@136.151,134.525 ; C10.1@135.876,87.425 135.876,86.299 135.127,85.55 135.177,85.5 v1(136.1,85.5) ; v1(135.908,117.615) 135.908,117.908 135.414,118.403 C6.2 135.414,118.503 135.894,118.983 135.894,120.117 C7.1 ; v1(136.1,26.9) C13.2 135.414,27.957 135.707,28.25 135.894,28.25 136.169,28.525 C15.1 C15.1@136.169,29.075 ; C14.1@136.151,42.6 135.876,42.325 135.876,41.499 135.127,40.75 135.127,40.7 135.227,40.6 v1(136.2,40.6) ; C11.1@136.169,73.575 C11.1 136.169,73.025 135.894,72.75 135.789,72.75 135.414,72.375 C9.2 135.514,71.1 v1(136.2,71.1)
  Bottom Layer w0.5: J10.2@140.457,127.974 J10.2
Gon1: Q2.1 R8.2 | length 2.1
  Top Layer w0.5: R8.2@133.237,114.594 133.237,112.733 133.275,112.695 Q2.1
Gon2: Q4.1 R10.2 | length 2.1
  Top Layer w0.5: Q4.1 133.477,65.874 133.477,67.988 R10.2
Gon3: Q6.1 R12.2 | length 2
  Top Layer w0.5: Q6.1 133.477,21.971 133.477,23.888 R12.2
Gpc1: Q1.1 R7.2 | length 2.2
  Top Layer w0.5: Q1.1 133.486,128.646 133.693,128.853 R7.2
Gpc2: Q3.1 R9.2 | length 2.1
  Top Layer w0.5: Q3.1 133.486,82.293 133.693,82.5 R9.2
Gpc3: Q5.1 R11.2 | length 1.9
  Top Layer w0.5: Q5.1 133.486,36.993 133.693,37.2 R11.2
KonA1: C6.1 C7.2 D2.1 J11.1 K2.5 | length 17.6
  Top Layer w0.5: K2.5@129.814,118.539 K2.5 129.897,118.794 133.219,118.794 ; C7.2 133.219,118.794 ; J11.1@140.708,116.285 135.611,116.285 134.289,117.607 134.289,118.328 C6.1 134.164,118.503 134.039,118.628 133.385,118.628 133.219,118.794
  Bottom Layer w0.5: D2.1 127.61,117.48 128.257,117.48 129.402,118.625 K2.5
KonA2: C9.1 C11.2 D4.1 J13.1 K4.5 | length 17.8
  Top Layer w0.5: K4.5 131.956,71.762 C11.2@133.219,73.025 ; C11.2 C11.2@133.219,73.025 ; J13.1 140.393,69.4 135.1,69.4 134.289,70.211 134.289,71.075 C9.1 134.039,71.325 134.039,72.205 C11.2@133.219,73.025
  Bottom Layer w0.5: D4.1 127.49,70.48 128.394,70.48 129.676,71.762 K4.5 K4.5@129.641,71.675
KonA3: C13.1 C15.2 D6.1 J15.1 K6.5 | length 17.5
  Top Layer w0.5: K6.5 131.089,28.8 C15.2 133.219,28.525 134.039,27.705 134.039,27.025 C13.1 134.289,26.775 134.289,26.211 135.3,25.2 140.473,25.2 J15.1
  Bottom Layer w0.508: D6.1 127.989,25.7 K6.5
KonB1: D2.2 K2.1 Q2.2 | length 7.4
  Top Layer w0.5: K2.1 132.699,111.125 133.029,110.795 Q2.2
  Top Layer w1.016: K2.1 K2.1@129.778,111.075
  Bottom Layer w0.5: D2.2 127.61,112.7 128.153,112.7 K2.1
KonB2: D4.2 K4.1 Q4.2 | length 7.4
  Top Layer w0.5: K4.1 132.729,64.262 133.029,63.962 Q4.2
  Bottom Layer w0.5: D4.2 127.371,65.819 128.171,65.819 K4.1
KonB3: D6.2 K6.1 Q6.2 | length 7.7
  Top Layer w0.5: K6.1 132.909,19.939 133.029,20.059 Q6.2
  Bottom Layer w1.016: D6.2 126.912,21.688 127.979,21.688 K6.1
KpcA1: C4.2 C5.1 D1.1 J10.1 K1.5 | length 17.4
  Top Layer w0.5: K1.5 129.969,133.09 133.201,133.09 ; C4.2@133.201,134.525 133.201,133.09 ; J10.1 134.68,130.57 133.882,131.368 133.882,132.239 133.877,132.244 133.877,132.464 133.752,132.589 133.702,132.589 133.201,133.09
  Bottom Layer w0.5: D1.1 127.5,131.84 128.259,131.84 129.268,132.849 K1.5 K1.5@129.679,132.8
KpcA2: C8.1 C10.2 D3.1 J12.1 K3.5 | length 17.9
  Top Layer w0.5: K3.5 131.889,86.113 C10.2@133.201,87.425 ; C10.2@133.201,87.7 C10.2@133.201,87.425 ; J12.1 139.978,84.175 134.325,84.175 134.002,84.498 134.002,85.375 133.877,85.5 133.877,85.55 133.752,85.675 133.702,85.675 133.201,86.176 C10.2@133.201,87.425
  Bottom Layer w0.5: D3.1 127.66,85.02 128.205,85.02 129.298,86.113 K3.5 K3.5@129.59,85.975
KpcA3: C12.1 C14.2 D5.1 J14.1 K5.5 | length 17.5
  Top Layer w0.5: K5.5 132.285,41.409 C14.2@133.201,42.325 ; C14.2@133.201,42.6 C14.2@133.201,42.325 ; J14.1 134.65,39.24 134.01,39.88 134.01,40.567 133.877,40.7 133.877,41.757 133.584,42.05 133.476,42.05 C14.2@133.201,42.325
  Bottom Layer w0.5: D5.1 127.24,39.99 128.309,39.99 K5.5
KpcB1: D1.2 K1.1 Q1.2 | length 7.6
  Top Layer w0.5: K1.1 130.155,124.922 Q1.2
  Bottom Layer w0.5: D1.2 127.5,127.06 128.017,127.06 K1.1
KpcB2: D3.2 K3.1 Q3.2 | length 7.2
  Top Layer w0.5: K3.1 132.993,78.613 133.05,78.67 Q3.2
  Bottom Layer w0.5: D3.2 127.66,80.24 128.101,80.24 K3.1
KpcB3: D5.2 K5.1 Q5.2 | length 7.7
  Top Layer w0.5: K5.1 132.689,33.909 133.05,33.548 Q5.2
  Bottom Layer w0.5: D5.2 126.984,35.466 128.171,35.466 K5.1 K5.1@129.709,33.89
N_Virt: R2.1 R4.1 R6.1
NetJ10_3: J10.3 R7.1 | length 6.9
  Top Layer w0.5: R7.1 137.05,128.953 J10.3
NetJ11_3: J11.3 R8.1 | length 7.5
  Top Layer w0.5: R8.1@134.637,114.594 137.319,114.594 J11.3@140.708,111.205
NetJ12_3: J12.3 R9.1 | length 7.1
  Top Layer w0.5: R9.1 136.473,82.6 J12.3
NetJ13_3: J13.3 R10.1 | length 7.2
  Top Layer w0.5: R10.1 136.713,68 J13.3
NetJ15_3: J15.3 R12.1 | length 7.2
  Top Layer w0.5: R12.1 136.773,23.9 J15.3
PhC1: L1.1 P1.1 P1.2 P1.3 P1.4 P1.5 P1.6 P1.7 P1.8 P1.9 P1.10
PhC2: L3.1 P2.1 P2.2 P2.3 P2.4 P2.5 P2.6 P2.7 P2.8 P2.9 P2.10
PhC3: L5.1 P3.1 P3.2 P3.3 P3.4 P3.5 P3.6 P3.7 P3.8 P3.9 P3.10
PhD1: C1.2 L1.2 L2.1
PhD2: C2.2 L3.2 L4.1
PhD3: C3.2 L5.2 L6.1
PhDR1: C1.1 R2.2
PhDR2: C2.1 R4.2
PhDR3: C3.1 R6.2
PhF1: K1.3 L2.2 R1.1
PhF2: K3.3 L4.2 R3.1
PhF3: K5.3 L6.2 R5.1
PhI1: J2.1 J2.2 J2.3 J2.4 J2.5 J2.6 K2.4
PhI2: J4.1 J4.2 J4.3 J4.4 J4.5 J4.6 K4.4
PhI3: J6.1 J6.2 J6.3 J6.4 J6.5 J6.6 K6.4
PhIF1: J1.1 J1.2 J1.3 J1.4 J1.5 J1.6 J1.7 J1.8 J7.1 J7.2 J7.3 J7.4 J7.5 J7.6 J7.7 J7.8 J7.9 J7.10
PhIF2: J3.1 J3.2 J3.3 J3.4 J3.5 J3.6 J3.7 J3.8 J8.1 J8.2 J8.3 J8.4 J8.5 J8.6 J8.7 J8.8 J8.9 J8.10
PhIF3: J5.1 J5.2 J5.3 J5.4 J5.5 J5.6 J5.7 J5.8 J9.1 J9.2 J9.3 J9.4 J9.5 J9.6 J9.7 J9.8 J9.9 J9.10
PhK1: K1.4 K2.3 R1.2
PhK2: K3.4 K4.3 R3.2
PhK3: K5.4 K6.3 R5.2
pads on no net: J14.3 MH1.* MH2.* MH3.* MH4.* MH5.* MH6.* MH7.* R11.1

## Polygon pours and split planes (outlines as drawn)
PhI3 on Bottom Layer "PhI1_L-02_P-001" (solid, pour order 64): 103.177,22.047 110.543,22.047 113.1,19.49 113.1,10.68 112.543,10.123 101.78,10.123 101.78,18.129 101.78,20.65
PhI1 on Bottom Layer "PhI1_L-02_P-001" (solid, pour order 14): 102.997,114.044 110.363,114.044 113.08,111.327 113.08,102.87 112.33,102.12 101.6,102.12 101.6,110.126 101.6,112.647
PhIF3 on Bottom Layer "PhIF1_L-02_P-001" (solid, pour order 66): 114.17,16.118 123.306,16.104 125.335,14.075 137.675,14.075 137.675,2.1 118.118,2.1 114.17,6.068
PhIF2 on Bottom Layer "PhIF1_L-02_P-001" (solid, pour order 58): 114.14,60.818 123.306,60.804 124.423,59.686 137.675,59.686 137.675,47.65 117.272,47.65 114.14,50.798
PhIF1 on Bottom Layer "PhIF1_L-02_P-001" (solid, pour order 13): 114.14,107.699 123.318,107.685 126.661,104.342 137.687,104.342 137.687,92.37 119.434,92.37 114.14,97.691
PhC3 on Bottom Layer "PHC3_L02_P036" (solid, pour order 36): 2.054,47.698 8.346,47.702 9,47.048 9,25.2 12.585,25.2 12.59,19.9 2.054,19.9
PhC2 on Bottom Layer "PHC2_L02_P034" (solid, pour order 34): 2.054,87.498 8.346,87.502 9,86.848 9,70.7 12.576,70.7 12.576,66.976 11.6,66 2.054,66
PhC1 on Bottom Layer "PHC1_L02_P018" (solid, pour order 18): 2.105,128.272 8.397,128.275 9.051,127.621 9.051,116.864 11.275,116.864 12.021,116.118 12.051,116.118 12.642,115.527 12.627,115.512 12.627,112.425 11.502,111.3 2.105,111.3
PhK3 on Bottom Layer "PHK3_L02_P062" (solid, pour order 62): 105.776,37.308 110.094,37.308 111.364,36.038 111.364,23.719 110.602,22.957 103.109,22.957 101.585,24.481 101.585,33.117
PhF3 on Bottom Layer "PhF1_L-02_P-001" (solid, pour order 60): 110.091,45.785 111.234,44.642 111.234,39.562 109.837,38.165 105.265,38.165 100.693,33.593 100.693,19.242 98.788,17.337 81.135,17.337 77.96,20.512 77.96,43.245 80.5,45.785
PhI2 on Bottom Layer "PhI1_L-02_P-001" (solid, pour order 56): 103.047,66.902 110.413,66.902 113.07,64.245 113.07,55.39 112.658,54.978 101.65,54.978 101.65,62.984 101.65,65.505
PhK2 on Bottom Layer "PhK1_L-02_P-001" (solid, pour order 54): 105.669,82.121 109.987,82.121 111.257,80.851 111.257,68.532 110.495,67.77 103.002,67.77 101.478,69.294 101.478,77.93
PhF2 on Bottom Layer "PhF1_L-02_P-001" (solid, pour order 52): 110.026,90.431 111.169,89.288 111.169,84.208 109.772,82.811 105.2,82.811 100.628,78.239 100.628,63.888 98.723,61.983 81.07,61.983 77.895,65.158 77.895,87.891 80.435,90.431
PhD3 on Bottom Layer "PhD1_L-01_P-001" (solid, pour order 40): 49.697,28.452 49.697,49.9 43.601,49.9 43.601,17.149 61,17.149 61,28.452
PhD2 on Bottom Layer "PhD1_L-01_P-001" (solid, pour order 38): 49.697,74.152 49.697,95.1 43.601,95.1 43.601,62.849 61,62.849 61,74.152
PhDR3 on Bottom Layer "PHDR3_L02_P033" (solid, pour order 33): 63.088,47.4 63.088,36.511 63.088,36.489 63.088,36.4 57.5,36.4 57.5,47.4
PhDR2 on Bottom Layer "PHDR2_L02_P032" (solid, pour order 32): 63.088,93 63.088,83.411 63.088,83.389 63.088,83.3 57.5,83.3 57.5,93
GND on Bottom Layer "GND_L02_P023" (solid, pour order 23): 135.6,86.95 135.6,65.25 137.5,63.35 142.067,63.35 142.067,86.979 135.603,86.979
GND on Bottom Layer "GND_L02_P025" (solid, pour order 25): 135.6,41.852 135.6,21.47 137.21,19.86 142.067,19.86 142.067,41.881 135.603,41.881
GND on Bottom Layer "GND_L02_P021" (solid, pour order 21): 135.288,133.121 135.288,112.312 137.13,110.47 141.755,110.47 141.755,133.151 135.291,133.151
PhDR1 on Bottom Layer "PHDR1_L02_P016" (solid, pour order 16): 63.071,136.977 63.071,127.06 63.071,127.038 63.071,126.949 57.483,126.949 57.483,136.933 57.53,136.98 63.071,136.98
PhD1 on Bottom Layer "PhD1_L-02_P-001" (solid, pour order 8): 48.514,119.761 48.514,139.319 42.418,139.319 42.418,108.458 59.817,108.458 59.817,119.761
N_Virt on Bottom Layer "N_Virt_L-01_P-001" (solid, pour order 7): 71.501,137.033 71.501,33.528 65.786,33.528 65.786,137.033
PhK1 on Bottom Layer "PhK1_L-02_P-001" (solid, pour order 1): 105.791,129.159 110.109,129.159 111.379,127.889 111.379,115.57 110.617,114.808 103.124,114.808 101.6,116.332 101.6,124.968
PhF1 on Bottom Layer "PhF1_L-02_P-001" (solid, pour order 0): 110.236,137.541 111.379,136.398 111.379,131.318 109.982,129.921 105.41,129.921 100.838,125.349 100.838,110.998 98.933,109.093 81.28,109.093 78.105,112.268 78.105,135.001 80.645,137.541
PhIF3 on Top Layer "PhIF1_L-02_P-001" (solid, pour order 49): 114.17,16.118 123.306,16.104 125.335,14.075 137.675,14.075 137.675,2.1 118.118,2.1 114.17,6.068
PhIF2 on Top Layer "PhIF1_L-02_P-001" (solid, pour order 48): 114.14,60.818 123.306,60.804 124.423,59.686 137.675,59.686 137.675,47.65 117.272,47.65 114.14,50.798
PhIF1 on Top Layer "PhIF1_L-02_P-001" (solid, pour order 20): 114.14,107.699 123.318,107.685 126.661,104.342 137.687,104.342 137.687,92.37 119.434,92.37 114.14,97.691
PhC3 on Top Layer "PHC3_L01_P028" (solid, pour order 28): 2.054,47.698 8.346,47.702 9,47.048 9,25.2 12.585,25.2 12.59,19.9 2.054,19.9
PhC2 on Top Layer "PHC2_L01_P027" (solid, pour order 27): 2.054,87.498 8.346,87.502 9,86.848 9,70.7 12.576,70.7 12.576,66.976 11.6,66 2.054,66
PhC1 on Top Layer "PHC1_L01_P019" (solid, pour order 19): 2.105,128.272 8.397,128.275 9.051,127.621 9.051,116.864 11.275,116.864 12.021,116.118 12.051,116.118 12.642,115.527 12.627,115.512 12.627,112.425 11.502,111.3 2.105,111.3
PhK3 on Top Layer "PhK1_L-02_P-001" (solid, pour order 50): 105.776,37.308 110.094,37.308 111.364,36.038 111.364,23.719 110.602,22.957 103.109,22.957 101.585,24.481 101.585,33.117
PhK2 on Top Layer "PhK1_L-02_P-001" (solid, pour order 47): 105.669,82.121 109.987,82.121 111.257,80.851 111.257,68.532 110.495,67.77 103.002,67.77 101.478,69.294 101.478,77.93
PhF2 on Top Layer "PhF1_L-02_P-001" (solid, pour order 46): 110.026,90.431 111.169,89.288 111.169,84.208 109.772,82.811 105.2,82.811 100.628,78.239 100.628,63.888 98.723,61.983 81.07,61.983 77.895,65.158 77.895,87.891 80.435,90.431
PhF3 on Top Layer "PhF1_L-02_P-001" (solid, pour order 45): 110.091,45.785 111.234,44.642 111.234,39.562 109.837,38.165 105.265,38.165 100.693,33.593 100.693,19.242 98.788,17.337 81.135,17.337 77.96,20.512 77.96,43.245 80.5,45.785
PhI3 on Top Layer "PhI1_L-02_P-001" (solid, pour order 43): 103.177,22.047 110.543,22.047 113.1,19.49 113.1,10.68 112.543,10.123 101.78,10.123 101.78,18.129 101.78,20.65
PhI2 on Top Layer "PhI1_L-02_P-001" (solid, pour order 41): 103.047,66.902 110.413,66.902 113.07,64.245 113.07,55.39 112.658,54.978 101.65,54.978 101.65,62.984 101.65,65.505
PhD3 on Top Layer "PhD1_L-01_P-001" (solid, pour order 30): 49.697,28.452 49.697,49.9 43.601,49.9 43.601,17.149 61,17.149 61,28.452
PhD1 on Top Layer "PhD1_L-01_P-001" (solid, pour order 6): 48.514,119.761 48.514,139.319 42.418,139.319 42.418,108.458 59.817,108.458 59.817,119.761
PhD2 on Top Layer "PhD1_L-01_P-001" (solid, pour order 31): 49.697,74.152 49.697,95.1 43.601,95.1 43.601,62.849 61,62.849 61,74.152
PhI1 on Top Layer "PhI1_L-02_P-001" (solid, pour order 5): 102.997,114.046 110.363,114.046 113.09,111.319 113.09,102.88 112.33,102.12 101.6,102.12 101.6,110.128 101.6,112.649
PhK1 on Top Layer "PhK1_L-02_P-001" (solid, pour order 4): 105.791,129.159 110.109,129.159 111.379,127.889 111.379,115.57 110.617,114.808 103.124,114.808 101.6,116.332 101.6,124.968
PhF1 on Top Layer "PhF1_L-02_P-001" (solid, pour order 3): 110.236,137.541 111.379,136.398 111.379,131.318 109.982,129.921 105.41,129.921 100.838,125.349 100.838,110.998 98.933,109.093 81.28,109.093 78.105,112.268 78.105,135.001 80.645,137.541

## Silkscreen, mask and mechanical layers (free items; w line width, h text height)
Top Overlay:
  text "Filtro LCL Boost / v 2.0 - 2020 / AHWV/LSZ / F - IT18I0090" at 8.015,52.84 h1 r90
Board:
  lines w0.254: -0.127,0 ccw(c0,0) 0,-0.127 ; -0.127,0 ccw(c0,0) 0,-0.127 ; -0.127,0 -0.127,140.716 ; -0.127,140.716 cw(c0,140.716) 0,140.843 ; -0.127,140.716 cw(c0,140.716) 0,140.843 ; 0,-0.127 144.399,-0.127 ; 0,140.843 144.399,140.843 ; 144.399,-0.127 ccw(c144.399,0) 144.526,0 ; 144.399,-0.127 ccw(c144.399,0) 144.526,0 ; 144.399,140.843 cw(c144.399,140.716) 144.526,140.716 ; 144.399,140.843 cw(c144.399,140.716) 144.526,140.716 ; 144.526,0 144.526,140.716

## Dimensions
141.4,137.72 to 144.399,140.716 on Dimensions
141.4,137.72 to 144.399,140.716 on Dimensions
0,0 to 3,3 on Dimensions
3,3 to 0,0 on Dimensions
3,137.72 to 0,140.716 on Dimensions
3,137.72 to 0,140.716 on Dimensions
0,0 to 144.399,0 on Dimensions
111.702,11.86 to 115.482,11.86 on Dimensions
111.702,56.53 to 115.482,56.53 on Dimensions
111.702,103.959 to 115.482,103.959 on Dimensions
12.22,134.55 to -0.127,140.716 on Dimensions
46.609,46.101 to 51.287,22.733 on Dimensions
46.482,91.567 to 51.287,68.072 on Dimensions
46.355,135.636 to 51.287,113.919 on Dimensions
0,140.716 to 0,0 on Dimensions